# Altium PCB PCB-nilm1.PcbDoc
Units mil, origin at the board's own origin, x right, y up, seen from the top; angles counter-clockwise.
Board outline 1910 x 2165 mil, 2 copper layers (Top Layer, Bottom Layer); 33 components, 19 nets, 89 pads, 14 vias.
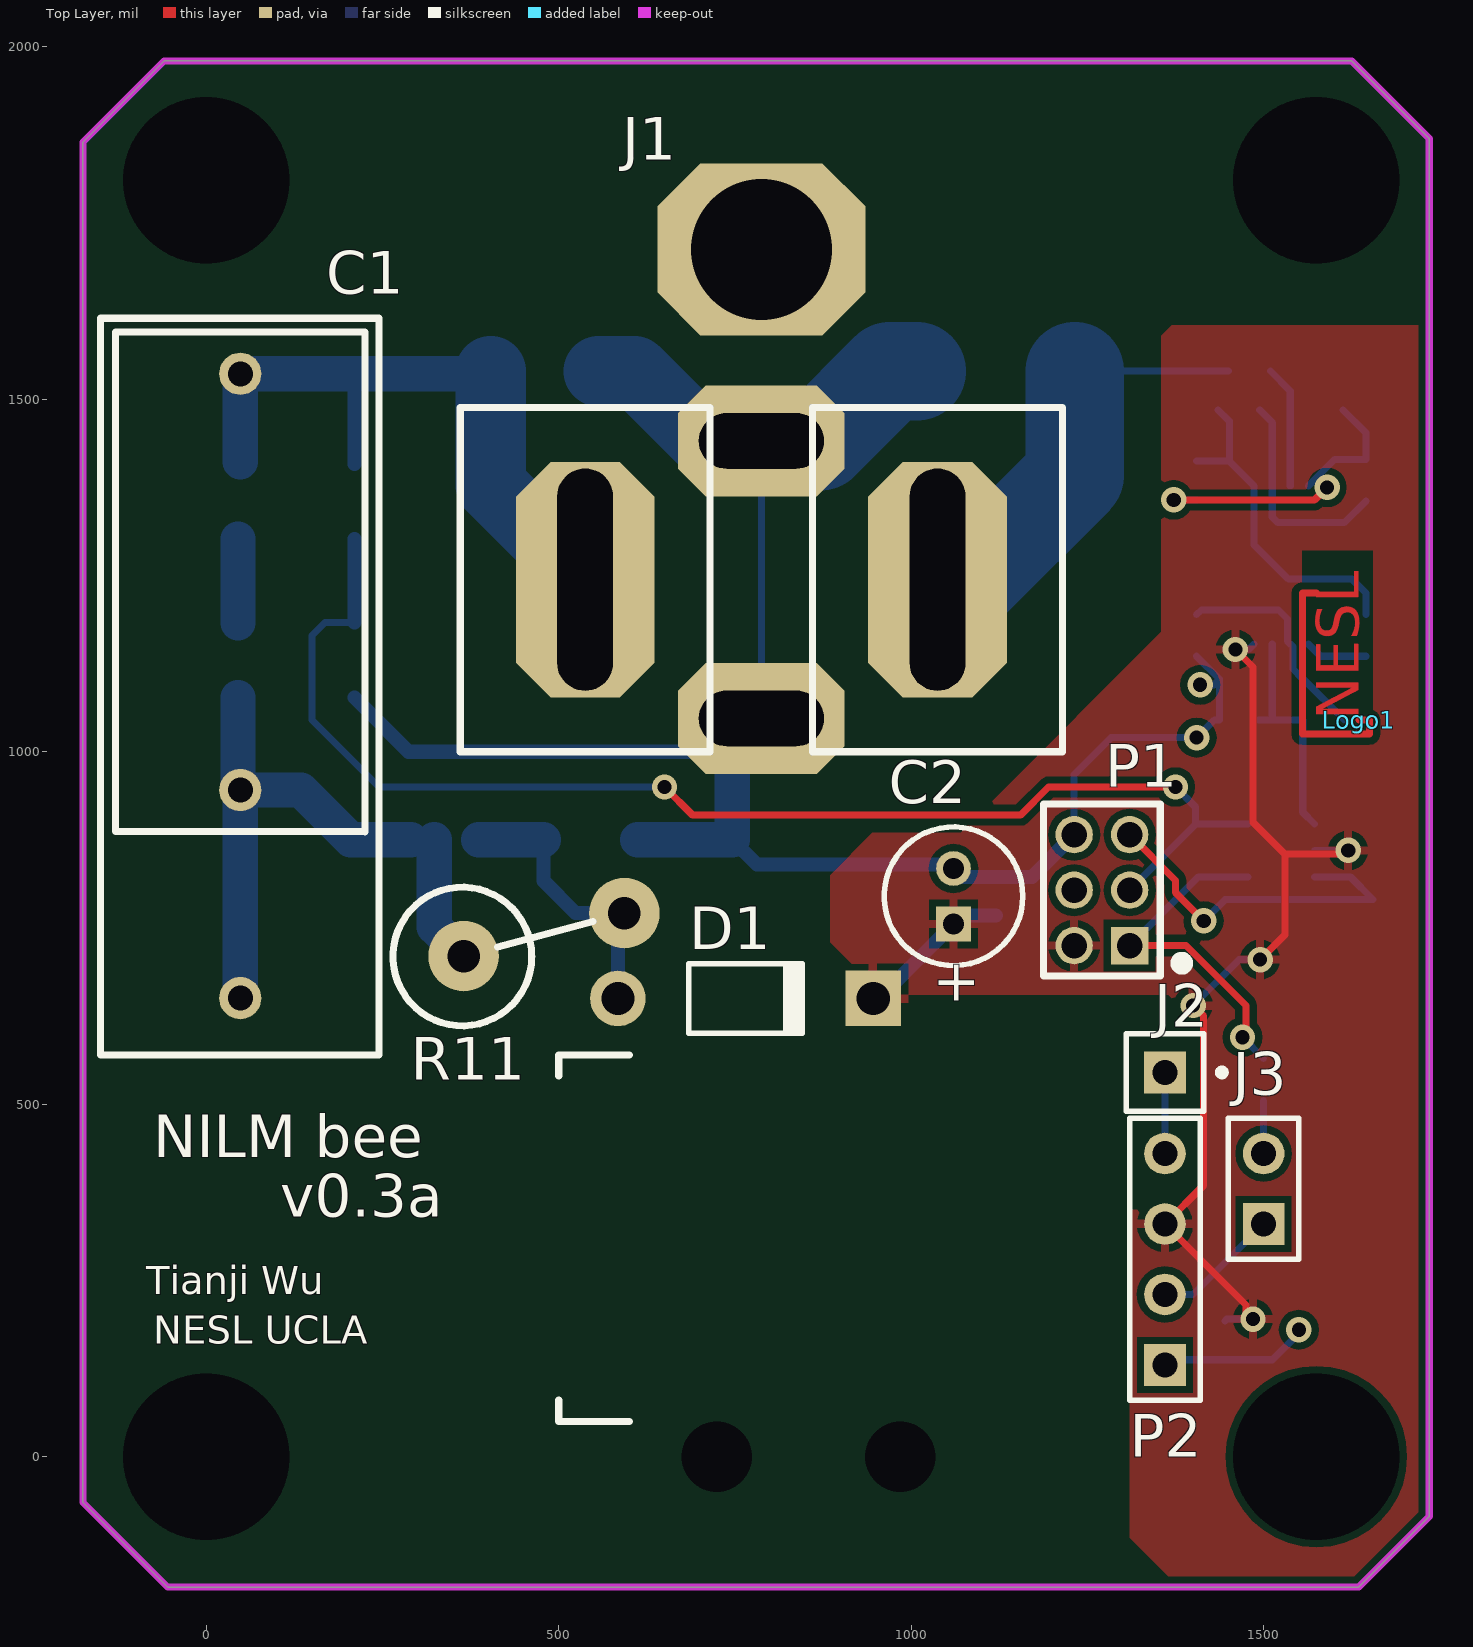
[diagram p0: Top Layer view]
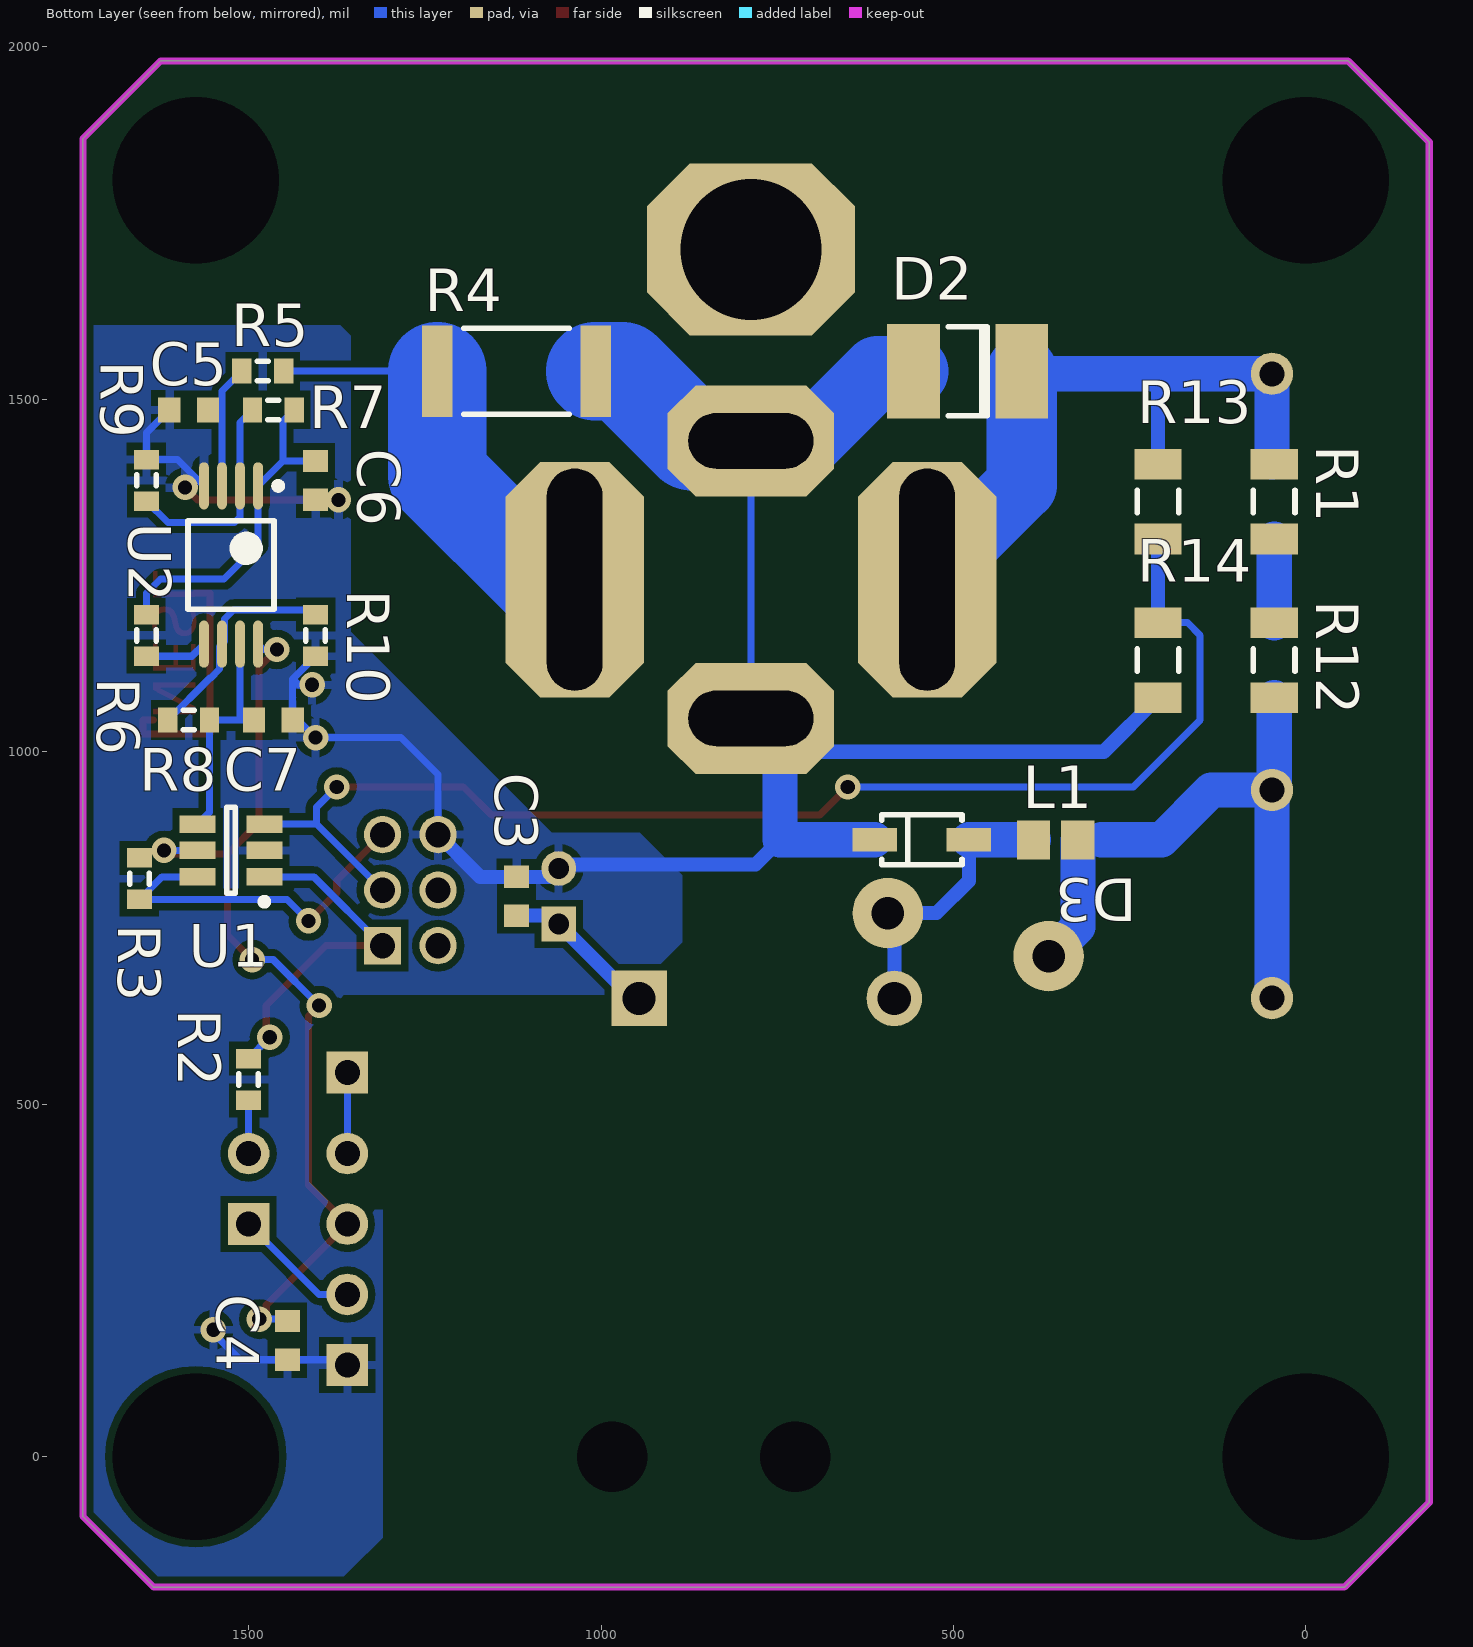
[diagram p1: Bottom Layer view, seen from below]

## Layer stack, top to bottom
Top Layer: signal copper 1.4
Dielectric: dielectric 12.6, FR-4, Dk 4.8
Bottom Layer: signal copper 1.4

## Board outline
-175,-65 -175,1865 -60,1980 1625,1980 1735,1870 1735,-85 1635,-185 -55,-185

## Design rules (kind name [scope] priority, off if disabled: settings)
Clearance "Clearance~Sunstone Circuits" [All] p1: gap=10 // Sunstone Circuits Minimum Clearance Rule (Double Sided)
HoleSize "HoleSize~Sunstone Circuits" [All] p1: absolutevalues=TRUE maxlimit=251 minlimit=16 maxpercent=80.000 minpercent=20.000 // SSC Hole Size Rule For Single Sided & Double Sided Designs.
HoleSize Testpoint [All] p2: absolutevalues=TRUE maxlimit=100 minlimit=1 maxpercent=80.000 minpercent=20.000
HoleSize TestPointUsage [All] p3: absolutevalues=TRUE maxlimit=100 minlimit=1 maxpercent=80.000 minpercent=20.000
MinimumAnnularRing "MinimumAnnularRing~Sunstone Circuits" [All] p1: minimumring=7 // Sunstone Circuits Minimum Annular Ring (Double Sided)
PlaneClearance "PlaneClearance~Sunstone Circuits" [All] p1: clearance=12 // Sunstone Circuits Power Plane Clearance Rule (Double Sided)
PlaneConnect "PlaneConnect~Sunstone Circuits" [All] p1: planeconnectstyle=Relief reliefexpansion=10 reliefentries=4 reliefconductorwidth=8 reliefairgap=10 // Sunstone Circuits Power Plane Connect Rule (Double Sided)
PolygonConnect "PolygonConnect~Sunstone Circuits" [All] p1: connectstyle=Relief reliefconductorwidth=12 reliefentries=4 polygonreliefangle="90 Angle" // Sunstone Circuits Polygon Connect Style (Double Sided)
RoutingVias "RoutingVias~Sunstone Circuits" [All] p1: holewidth=16 width=30 viastyle="Through Hole" minholewidth=16 minwidth=30 maxholewidth=20 maxwidth=40 // Sunstone Circuits Routing Vias Rule (Double Sided)
ShortCircuit "ShortCircuit~Sunstone Circuits" [All] p1: allowed=FALSE // Sunstone Circuits Short Circuit Rule~Do Not Allow (Double Sided)
SilkToSilkClearance [All] p1 off: silktosilkclearance=10
SilkscreenOverComponentPads [All] p1 off: minsilkscreentomaskgap=10
SolderMaskExpansion "SolderMaskExpansion~Sunstone Circuits" [All] p1: expansion=3 // Sunstone Circuits Solder Mask Expansion Rule (Double Sided)
ViasUnderSMD "ViasUnderSMD~Sunstone Circuits" [All] p1: allowed=FALSE // Sunstone Circuits Vias Under SMD~Do Not Allow (Double Sided)
Width "Width~Sunstone Circuits" [All] p1: maxlimit=200 minlimit=10 preferedwidth=10 // Sunstone Circuits Minimum Width Rule (Double Sided)
22 further rules are at their usual default settings.

## Components (designator, comment, footprint, x,y, rotation, side; value= is the part's Value field where it differs from the comment)
C1 "1uF" CAP-22.5mm 245,1615 r270 top
C2 "P5529-ND" CAPPR2-5x6.8 1060,795 r90 top
C3 "100nF" CAPC1608L 1120,795 r270 bottom
C4 "100nF" CAPC1608L 1445,165 r90 bottom
C5 "100nF" CAPC1608L 1585,1485 r180 bottom
C6 "100nF" CAPC1608L 1405,1385 r90 bottom
C7 "100nF" CAPC1608L 1465,1045 r0 bottom
D1 "641-1311-1-ND" DIO9.2-4.1x2.5 765,650 r0 top
D2 "TVS" CD4532-1812 480,1540 r180 bottom
D3 "D Zener" SOD123/X.85 545,875 r180 bottom
J1 "AC Pin Conn" AC_PLUG 787.4,1244.09 r0 top
J2 "Socket" PIN1 1360,545 r270 top
J3 "JUMPER" HDR1X2 1500,330 r90 top
L1 "445-6400-1-ND" INDC2012L 355,875 r0 bottom
Logo1 "LOGO1" NESL_logo 1635,1045 r90 top
P1 "Header 3X2" "6-pin 2mm" 1310,725 r90 top
P2 "Header 4" HDR1X4 1360,130 r90 top
R1 "P1.0MECT-ND" RESC3216L 45,1355 r270 bottom
R2 "10k" RESC1608L 1500,535 r90 bottom
R3 "10k" RESC1608L 1655,820 r270 bottom
R4 "R001" RESC6332L 1120,1540 r0 bottom
R5 "10K" RESC1608L 1480,1540 r0 bottom
R6 "10K" RESC1608L 1645,1165 r90 bottom
R7 "200K" RESC1608L 1465,1485 r180 bottom
R8 "100K" RESC1608L 1585,1045 r0 bottom
R9 "10K" RESC1608L 1645,1385 r270 bottom
R10 "10K" RESC1608L 1405,1165 r90 bottom
R11 "47W-1-ND" RES45x115VERT 365,710 r15 top
R12 "P1.0MECT-ND" RESC3216L 45,1130 r90 bottom
R13 "" RESC3216L 210,1355 r90 bottom
R14 "" RESC3216L 210,1130 r90 bottom
U1 "ATtiny 6pin" SOT23-6M 1525,860 r0 bottom
U2 "MCP6002T-I/MS" MSOP65P-8N 1525,1265 r270 bottom

## Footprints (in the part's own frame and the unit in brackets; to place one, negate y for a bottom-side part, rotate by r counter-clockwise, add the part's x,y. Pads: shape width x height; smd on the part's side, far side on the other; paste and mask are expansions set on the pad)
"6-pin 2mm" [mil] "6-pin 2mm spacing header"
  rect 53x53 hole 36: 1(0,0)
  round 53 hole 36: 2(0,78.74) 3(78.74,0) 4(78.74,78.74) 5(157.48,0) 6(157.48,78.74)
  silkscreen extent -43,-80 201,122
AC_PLUG [mm]
  oct 7.5x6.2 hole 5.08: 0(0,11.906)
  oct 5x8.5 hole 2 slot 8 at 90 deg: 1(-6.35,0) 2(6.35,0)
  oct 6x4 hole 2 slot 4.5 at 0 deg: 3(0,-5) 3(0,5)
  silkscreen extent -10.85,-6.2 10.85,6.2
CAP-22.5mm [mm]
  round 1.524 hole 0.9: 1(2,-5) 2(17,-5) 2(24.5,-5)
  silkscreen extent 0,-10.03 26.54,0, body extent 0.5,-9.5 18.51,-0.5, height 12.6
CAPC1608L [mm] "Chip Capacitor, Body 1.6x0.8mm, IPC High Density"
  rect 0.8x0.9 smd: 1(-0.7,0) 2(0.7,0)
  body extent -0.87,-0.48 0.87,0.48, height 1.3
CAPPR2-5x6.8 [mm] "Capacitor, Electrolytic, Radial; Body 5 x 6.8 mm (Dia.xH typ); Pin Spacing 2 mm (typ)"
  rect 1.25x1.25 hole 0.75: 1(-1,0)
  round 1.25 hole 0.75: 2(1,0)
  silkscreen extent -2.5,-2.5 2.5,2.5
CD4532-1812 [mm] "Chip Diode; Body 4.5 x 3.2 mm (LxW typ)"
  rect 1.9x3.4 smd: 1(-1.95,0) 2(1.95,0)
  silkscreen extent -0.7,-1.6 0.7,1.6
DIO9.2-4.1x2.5 [mm] "Diode, Axial; Body 4.1 x 2.5 mm (LxDia. max), Lead Dia. 0.85 mm (max)"
  round 2 hole 1.2: 1(-4.6,0)
  rect 2x2 hole 1.2: 2(4.6,0)
  silkscreen extent -2.05,-1.25 2.15,1.25
HDR1X2 [mm] "Connector; Header; 2 Position"
  rect 1.5x1.5 hole 0.9: 1(0,0)
  round 1.5 hole 0.9: 2(2.54,0)
  silkscreen extent -1.27,-1.27 3.81,1.27
HDR1X4 [mm] "Connector; Header; 4 Position"
  rect 1.5x1.5 hole 0.9: 1(0,0)
  round 1.5 hole 0.9: 2(2.54,0) 3(5.08,0) 4(7.62,0)
  silkscreen extent -1.27,-1.27 8.89,1.27
INDC2012L [mm] "Chip Inductor, Body 2.0x1.2mm, IPC High Density"
  rect 1.2x1.4 smd: 1(-0.8,0) 2(0.8,0)
  body extent -1.1,-0.7 1.1,0.7, height 0.55
MSOP65P-8N [mm] "SOP, 8-Leads, Body 3x4.4mm, Pitch 0.65mm, IPC Medium Density"
  oval 1.7x0.35 smd: 1(-2.85,0.975) 2(-2.85,0.325) 3(-2.85,-0.325) 4(-2.85,-0.975) 5(2.85,-0.975) 6(2.85,-0.325) 7(2.85,0.325) 8(2.85,0.975)
  silkscreen extent -2.97,-1.55 1.6,1.82, body extent -2.25,-1.55 2.25,1.55, height 1.1
NESL_logo [mil]
  Top Layer lines w10: 180,60 180,80 -20,80 -20,-15 0,-15 0,0
PIN1 [mm] "Connector; Plug"
  rect 1.5x1.5 hole 0.9: 1(0,0)
  silkscreen extent -1.4,-1.4 1.4,2.18
RES45x115VERT [mil]
  round 100 hole 46: 1(0,0) 2(236.22,0)
  silkscreen extent -100,-98 190,98
RESC1608L [mm] "Chip Resistor, Body 1.6x0.8mm, IPC High Density"
  rect 0.7x0.9 smd: 1(-0.75,0) 2(0.75,0)
  silkscreen extent -0.2,-0.35 0.2,0.35, body extent -0.85,-0.48 0.85,0.48, height 0.9
RESC3216L [mm] "Chip Resistor, Body 3.1x1.6mm, IPC High Density"
  rect 1.1x1.7 smd: 1(-1.35,0) 2(1.35,0)
  silkscreen extent -0.4,-0.75 0.4,0.75, body extent -1.68,-0.87 1.68,0.87, height 2.54
RESC6332L [mm] "Chip Resistor, Body 6.3x3.2mm, IPC High Density"
  rect 1.1x3.3 smd: 1(-2.85,0) 2(2.85,0)
  silkscreen extent -1.9,-1.55 1.9,1.55, body extent -3.22,-1.68 3.22,1.68, height 0.9
SOD123/X.85 [mm] "SOD-123; 2 Leads; Body 2.7 x 1.6 mm, (LxW)"
  rect 1.6x0.85 smd: 1(-1.7,0) 2(1.7,0)
  silkscreen extent -1.45,-0.9 1.45,0.9
SOT23-6M [mm] "SOT23, 6-Leads, Body 2.9x1.6mm, Pitch 0.95mm, Lead Span 2.7mm, IPC Low Density"
  rect 1.3x0.635 smd: 1(-1.2,0.95) 2(-1.2,0) 3(-1.2,-0.95) 4(1.2,-0.95) 5(1.2,0) 6(1.2,0.95)
  silkscreen extent -1.32,-1.55 0.15,1.97, body extent -0.9,-1.55 0.9,1.55, height 1.45

## Part data
C1: library part Cap, "Capacitor"
C2: library part "Cap Pol3", "Polarized Capacitor (Surface Mount)"
C3 C4 C5 C6 C7: library part "Cap Semi", "Capacitor (Semiconductor SIM Model)"
D1: library part Diode, "Default Diode"
D3: "MMSZ5229BFSCT-ND"
J1: library part AC_Plug
L1: library part Inductor, "Inductor"
Logo1: library part 2447, "NESL LOGO COPPER SMALL"
P1: "Header, 3-Pin, Dual row"
P2: "Header, 4-Pin"
R1 R2 R3 R4 R5 R6 R7 R8 R9 R10 R12 R13 R14: library part Res3, "Resistor"
R11: library part Res1, "Resistor"
U1: library part ATtiny4/5/9/10, "ATtiny4/5/9/10"
U2: library part 2484, "mcp6002 series 6 v 1 mhz smt low"

## Free pads (board coordinates)
  round 216.54 hole 236.22: 0(0,0) 0(0,1811.02) 0(1574.8,0) 0(1574.8,1811.02)
  round 80 hole 100: 9(724.41,0) 10(984.25,0)

## Via types
v1: diameter 36, hole 20, Top Layer to Bottom Layer, tented both sides, 14 vias

## Nets (pads, with @x,y where several pads share a name; then routed paths per layer and width w, separated by ;. In a path a pad name is that pad's centre, name@x,y a point inside that pad or via, vN(x,y) a via of type N, cw(c..) or ccw(c..) an arc to the next point about the centre after c; other vN are vias at no path point)
ANT: J2.1 P2.4 | length 115
  Bottom Layer w10: P2.4 J2.1
ASIG: C7.2 R8.1 U1.4 U2.7 | length 326.2
  Bottom Layer w10: C7.2 1510,1045 ; U2.7 1512.2,1047.2 1510,1045 ; U1.4 1555.47,914.17 R8.1 1510,1045
NetC1_2: C1.2 L1.1 R11.1 R12.1 | length 881
  Bottom Layer w50: R12.1 45,948.86 C1.2@48.15,945.71 ; C1.2@48.15,650.43 C1.2@48.15,945.71 ; 290,875 205,875 134.29,945.71 C1.2@48.15,945.71 ; L1.1 323.5,751.5 R11.1
NetC5_2: C5.2 R5.2 U2.3 | length 174.5
  Bottom Layer w10: R5.2 1537.8,1511.73 U2.3
NetC6_2: C6.2 R6.2 R7.2 U2.1 | length 501.8
  Bottom Layer w10: C6.2 1451.26,1412.56 ; R7.2 1451.26,1469.21 1451.26,1412.56 ; U2.1@1486.61,1351.61 U2.1 ; R6.2 1645,1225 1625,1245 1535,1245 1486.61,1293.39 U2.1 ; 1451.26,1412.56 U2.1
NetD1_1: D1.1 D3.2 L1.2 R11.2 | length 408.7
  Bottom Layer w20: D3.2 478.07,816.93 523.86,771.14 R11.2 583.9,761.86 D1.1
  Bottom Layer w50: L1.2 D3.2
NetJ3_2: J3.2 R2.1 | length 75.5
  Bottom Layer w10: J3.2 R2.1
NetR1_2: R1.2 R12.2 | length 118.7
  Bottom Layer w50: R12.2 R1.2
NetR6_1: R6.1 U2.5 | length 88.8
  Bottom Layer w10: U2.5 1580.71,1135.47 R6.1
NetR7_1: R7.1 R9.2 U2.2 | length 308.2
  Bottom Layer w10: R7.1 1512.2,1467.32 U2.2 1512.2,1332.8 1520,1325 1614.53,1325 R9.2
NetR8_2: R8.2 R10.2 U2.6 | length 314.5
  Bottom Layer w10: R10.2 1411.73,1201.26 1521.27,1201.26 1534.09,1188.44 1534.09,1156.5 U2.6 1541.5,1149.09 1541.5,1117.15 1554.32,1104.33 1555.2,1104.33 R8.2
NEUTRAL_IN: C2.2 C3.1 C4.1 C5.1 C6.1 C7.1 D2.1 D3.1 J1.3 P1.6 P2.1 R4.1 R9.1 R10.1 R14.1 U1.2 U2.4 | length 3470
  Top Layer w10: P2.1 P2.1@1365,135 ; v1(1372.44,1357.44) 1572.44,1357.44 v1(1590,1375)
  Bottom Layer w10: J1.3@787.4,1047.24 J1.3@787.4,1440.94 ; P1.6 1231.26,967.48 1283.78,1020 v1(1405,1020) 1430,1045 C7.1 1437.44,1103.03 ; P2.1 1367.44,137.44 C4.1 1512.44,137.44 1550,175 v1(1550,180) ; v1(1372.44,1357.44) C6.1 ; R10.1 1437.44,1103.03 ; v1(1410,1095) 1429.41,1095 1437.44,1103.03 ; U2.4 1600.71,1414.53 R9.1 1645,1452.56 C5.1
  Bottom Layer w20: R14.1 286.85,1000 J1.3@740.16,1000 ; 746.1,875 781.1,840 1054.37,840 1071.81,822.56 C3.1 1171.34,822.56 P1.6 ; J1.3@781.1,1040.94 J1.3@787.4,1047.24
  Bottom Layer w50: D3.1 746.1,875 746.1,1005.94 J1.3@787.4,1047.24
  Bottom Layer w100: D2.1 607.4,1540 706.46,1440.94 787.4,1440.94 J1.3@870.94,1440.94
  Bottom Layer w140: J1.3@870.94,1440.94 970,1540 R4.1
NEUTRAL_OUT: J1.2 R4.2 R5.1 | length 622.2
  Bottom Layer w10: R4.2 R5.1
  Bottom Layer w100: J1.2 J1.2@1084.09,1244.09
  Bottom Layer w140: J1.2@1084.09,1244.09 1232.2,1392.2 R4.2
PHASE_IN: C1.1 D2.2 J1.1 R1.1 R13.2 | length 965.6
  Bottom Layer w20: R1.1 R1.1@48.15,1411.3 ; R13.2 210,1536.26 ; D2.2@399.49,1536.26 D2.2
  Bottom Layer w50: R1.1@48.15,1411.3 C1.1 210,1536.26 D2.2@399.49,1536.26
  Bottom Layer w100: D2.2 403.23,1378.27 J1.1
RFDATA: J3.1 P2.2 | length 181.4
  Bottom Layer w10: P2.2 1400,230 J3.1
RST: P1.5 R3.2 U1.6 | length 514.7
  Top Layer w10: P1.5 1375,817.48 1375,800 v1(1415,760)
  Bottom Layer w10: v1(1415,760) 1445.47,790.47 R3.2 1622.87,822.6 U1.6
TPICLK: P1.3 R13.1 R14.2 U1.3 | length 1874.7
  Top Layer w10: v1(650,950) 690,910 1155,910 1195,950 v1(1375,950)
  Bottom Layer w10: R14.2 168.15,1183.15 150,1165 150,1045 245,950 v1(650,950) ; P1.3 1403.66,897.4 ; v1(1375,950) 1403.66,921.34 1403.66,897.4 ; U1.3 1403.66,897.4
  Bottom Layer w20: R14.2 R13.1
TPIDATA: P1.1 R2.2 U1.1 | length 498.4
  Top Layer w10: P1.1 1390,725 1475,640 1475,600 v1(1470,595)
  Bottom Layer w10: P1.1 1407.6,822.6 U1.1 ; v1(1470,595) 1500,565 R2.2
VCC: C2.1 C3.2 C4.2 D1.2 P1.2 P2.3 R3.1 U1.5 U2.8 | length 1557
  Top Layer w10: v1(1400,640) 1415,625 1415,385 P2.3 1475,215 1475,190 v1@1480,195 ; v1(1460,1145) 1485,1120 1485,900 1530,855 ; v1(1495,705) 1530,740 1530,855 ; v1(1620,860) 1615,855 1530,855
  Bottom Layer w10: v1(1400,640) 1465,705 v1(1495,705) ; C4.2 1447.44,195 v1(1485,195) ; v1(1460,1145) 1478.82,1145 U2.8 ; U1.5 v1(1620,860)
  Bottom Layer w20: D1.2@959.37,655 C2.1 1071.81,767.44 C3.2
pads on no net: J1.0 P1.4

## Polygon pours and split planes (outlines as drawn)
NEUTRAL_IN on Bottom Layer "GND" (solid, pour order 1001): 1365,1600 1355,1590 1355,1170 1070,885 945,885 885,825 885,730 960,655 1365,655 1415,605 1415,390 1375,350 1310,350 1310,60 1310,-115 1355,-160 1380,-185 1635,-185 1635,-170 1735,-70 1735,1605 1370,1605 1365,1600
VCC on Top Layer "VCC" (solid, pour order 1000): 1365,1600 1355,1590 1355,1170 1070,885 945,885 885,825 885,730 960,655 1365,655 1415,605 1415,390 1375,350 1310,350 1310,60 1310,-115 1355,-160 1380,-185 1635,-185 1635,-170 1735,-70 1735,1605 1370,1605 1365,1600

## Keep-outs
Keep-Out Layer:
  lines w10: -175,-65 -175,1860 -175,1865 -60,1980 1625,1980 1735,1870 1735,-85 1635,-185 -55,-185 -175,-65

## Silkscreen, mask and mechanical layers (free items; w line width, h text height)
Top Overlay:
  lines w10: 500,80 500,50 600,50 ; 500,540 500,570 600,570
  text "NILM bee" at -75,425 h60
  text "v0.3a" at 105,340 h60
  text "Tianji Wu" at -85,230 h40
  text "NESL UCLA" at -75,160 h40
Bottom Solder:
  lines w10: 865,1440 870,1440 ; 1035,1320 1060,1320
  lines w90: 1255,1395 1255,1550
  lines w130: 870,1440 975,1545 ; 1120,1285 1230,1395

## Dimensions
0,0 to 1574.8,0 on Mechanical 13
0,0 to 0,1811.02 on Mechanical 13
0,1811.02 to 787.4,1712.83 on Mechanical 13
-175,-65 to 1735,-85 on Mechanical 13
-55,-185 to -60,1980 on Mechanical 13

## Text inside footprints (layer, text, board x,y; h text height)
C2: Top Overlay "+" at 1089.53,638.5 h59.06 r90
Logo1: Top Layer "NESL" at 1635,1045 h60 r90; Top Solder "NESL" at 1635,1045 h60 r90